# EAGLE board Temperature Based Fan Speed Control (EAGLE 9.7.0)

Size 251.31 x 101.05 mm. Coordinates in mm from the lower left corner, seen from the top.
Outline: 0,0 251.31,0 251.31,101.05 0,101.05 0,0
Copper layers (1*16): Top 0.035mm / dielectric 1.5mm / Bottom 0.035mm
Design rules "default": minimum track width 6mil, minimum drill 0.35mm, track to track 6mil, track to pad 6mil, pad to pad 6mil, via to via 6mil, smd to smd 6mil, copper to edge 40mil, drill to drill 6mil, minimum pad ring 10mil, minimum via ring 8mil, stop-mask expansion 4mil, vias tented up to drill 0mil, thermal gap 10mil

## Footprints (pad centres in the part's own frame; a part is rotated, then mirrored left to right if it is on the bottom)
LU-5-R = drill 0.8: 1 -6.35,-3.81; 5 3.81,-3.81; 6 6.35,-3.81; 7 6.35,3.81; 8 3.81,3.81; 12 -6.35,3.81
MOTOR = drill 1.118 pad 3.15 octagon: + 2.54,0; - -2.54,0
RESAD1016W63L850D250B = drill 0.83 pad 1.43: 1 -5.08,0; 2 5.08,0
TSOP48 = drill 0.8: 1 -2.54,0; 2 0,0; 3 2.54,0
ARDUINO-UNO-R3-SHIELD = drill 1.016 pad 1.88: 3.3V 24.13,-2.54; 5V 24.13,0; A0 24.13,12.7; A1 24.13,15.24; A2 24.13,17.78; A3 24.13,20.32; A4 24.13,22.86; A5 24.13,25.4; AREF -24.13,-13.97; D2 -24.13,20.32; D3 -24.13,17.78; D4 -24.13,15.24; D5 -24.13,12.7; D6 -24.13,10.16; D7 -24.13,7.62; D8 -24.13,3.81; D9 -24.13,1.27; D10 -24.13,-1.27; D11 -24.13,-3.81; D12 -24.13,-6.35; D13 -24.13,-8.89; GND@0 24.13,2.54; GND@1 24.13,5.08; GND@2 -24.13,-11.43; IOREF 24.13,-7.62; NC 24.13,-10.16; RES 24.13,-5.08; RX -24.13,25.4; SCL -24.13,-19.05; SDA -24.13,-16.51; TX -24.13,22.86; VIN 24.13,7.62
JHD-162A = drill 1.016 long: 1 -19.05,0; 2 -16.51,0; 3 -13.97,0; 4 -11.43,0; 5 -8.89,0; 6 -6.35,0; 7 -3.81,0; 8 -1.27,0; 9 1.27,0; 10 3.81,0; 11 6.35,0; 12 8.89,0; 13 11.43,0; 14 13.97,0; 15 16.51,0; 16 19.05,0
TO92 = drill 0.813 octagon: 1 -1.27,0; 2 0,1.905; 3 1.27,0

## Placement (x,y rotation side)
K1  RELAY-SPDT_LU-5-R  [LU-5-R]  205.36,90.13 270 top
M2  MOTOR_HDR  [MOTOR]  243.05,88.49 0 top
R2  1k  [RESAD1016W63L850D250B]  189.75,66.98 90 top
U1  IR-RECEIVERTSOP48  [TSOP48]  133.87,54.28 0 top
U4  ARDUINO-UNO-R3-SHIELD  [ARDUINO-UNO-R3-SHIELD]  47.88,38.81 270 top
U5  LCD-16X2JHD-162A  [JHD-162A]  173.24,36.63 0 top
U6  TMP36GT9Z_TO92  [TO92]  123.71,54.28 0 top

## Library data of the parts
K1 M2 R2 U1 U4-U6 = Tinkercad

## Nets
M2_+: K1.7 M2.+
U4_5V: R2.2 U1.3 U4.5V U5.2 U6.3
U4_A1: U4.A1 U6.2
U4_D2: U4.D2 U5.14
U4_D3: U4.D3 U5.13
U4_D4: U4.D4 U5.12
U4_D5: U4.D5 U5.11
U4_D8: K1.6 U4.D8
U4_D9: K1.1 U4.D9
U4_D10: U1.1 U4.D10
U4_D11: U4.D11 U5.6
U4_D12: U4.D12 U5.4
U4_GND: K1.8 M2.- U1.2 U4.GND@0 U4.GND@1 U4.GND@2 U5.1 U5.3 U5.5 U5.16 U6.1
U5_LED+: R2.1 U5.15

## Tracks (layer width: path | path; a pad name or v marks a point on that pad's centre or on a via)
M2_+  (1 unrouted)
U4_5V  (4 unrouted)
U4_A1  (1 unrouted)
U4_D2  (1 unrouted)
U4_D3  (1 unrouted)
U4_D4  (1 unrouted)
U4_D5  (1 unrouted)
U4_D8  (1 unrouted)
U4_D9  (1 unrouted)
U4_D10  (1 unrouted)
U4_D11  (1 unrouted)
U4_D12  (1 unrouted)
U4_GND  (10 unrouted)
U5_LED+  (1 unrouted)